# EAGLE board power_supply (EAGLE 5.10)
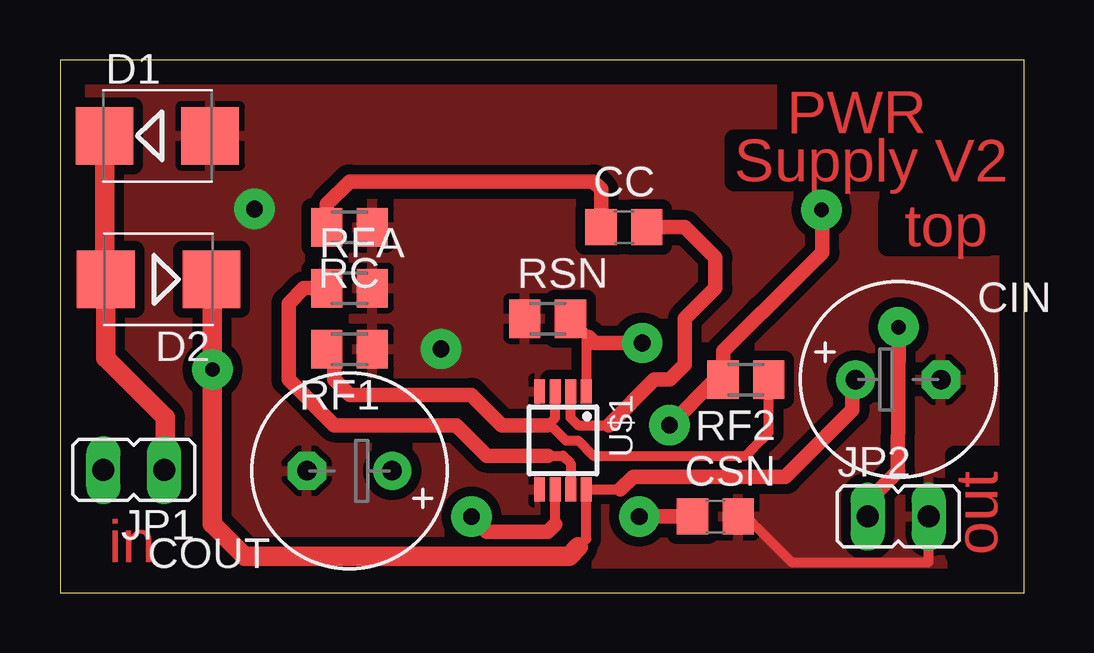
[diagram p0: board, top side]
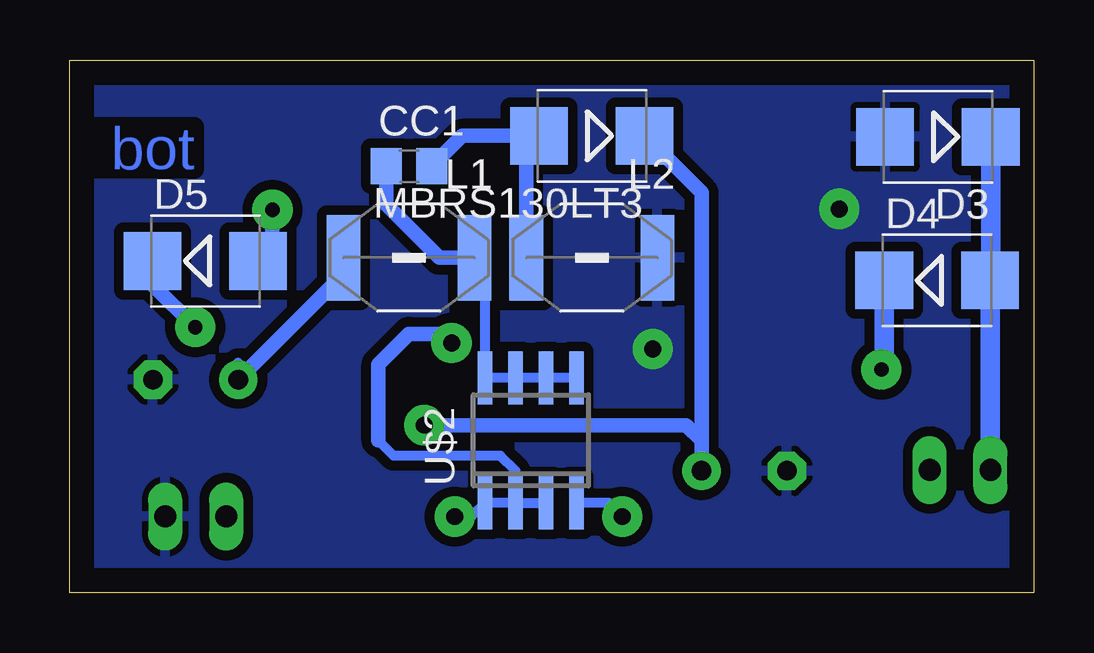
[diagram p1: board, bottom side, seen from below]

Size 40.17 x 22.21 mm. Coordinates in mm from the lower left corner, seen from the top.
Outline: 0,0 40.17,0 40.17,22.21 0,22.21 0,0
Copper layers (1*16): Top 0.035mm / dielectric 1.5mm / Bottom 0.035mm
Design rules "default": minimum track width 10mil, minimum drill 24mil, track to track 8mil, track to pad 8mil, pad to pad 8mil, via to via 8mil, smd to smd 8mil, copper to edge 40mil, drill to drill 8mil, minimum pad ring 10mil, minimum via ring 8mil, stop-mask expansion 4mil, vias tented up to drill 0mil, thermal gap 10mil

## Footprints (pad centres in the part's own frame; a part is rotated, then mirrored left to right if it is on the bottom)
C0805 = smd 1.3 x 1.5: 1 -0.95,0; 2 0.95,0
E3,5-8 = drill 0.813 pad 1.6 round: + -1.778,0 | drill 0.813 pad 1.6 octagon: - 1.778,0
SMB = smd 2.4 x 2.4: A 2.2,0; C -2.2,0
JP1 = drill 0.914 long: 1 0,-1.27; 2 0,1.27
S = smd 1.4 x 3.56: 1 -2.73,0; 2 2.73,0
M0805 = smd 1.3 x 1.6: 1 -0.95,0; 2 0.95,0
LM3478MM = smd 0.45 x 1: 1 -0.975,-2.05; 2 -0.325,-2.05; 3 0.325,-2.05; 4 0.975,-2.05; 5 0.975,2.05; 6 0.325,2.05; 7 -0.325,2.05; 8 -0.975,2.05
IRF7807PBF = smd 0.6 x 2.2: 1 -1.905,-2.6; 2 -0.635,-2.6; 3 0.635,-2.6; 4 1.905,-2.6; 5 1.905,2.6; 6 0.635,2.6; 7 -0.635,2.6; 8 -1.905,2.6

## Placement (x,y rotation side)
CC  22nF  [C0805]  23.5,15.24 0 top
CC1  1u  [C0805]  26.04,17.78 0 bottom
CIN  [E3,5-8]  34.92,8.89 0 top
COUT  [E3,5-8]  12.06,5.08 180 top
CSN  1n  [C0805]  27.3,3.17 0 top
D1  [SMB]  4.06,19.05 0 top
D2  [SMB]  4.11,13.07 180 top
D3  [SMB]  3.99,19.01 180 bottom
D4  [SMB]  4.03,13.03 0 bottom
D5  [SMB]  34.52,13.83 0 bottom
JP1  [JP1]  3.07,5.12 90 top
JP2  [JP1]  34.92,3.17 270 top
L1  [S]  26.04,13.97 180 bottom
L2  [S]  18.41,13.97 180 bottom
MBRS130LT3  [SMB]  18.41,19.05 180 bottom
RC  4,7k  [M0805]  12.06,15.24 180 top
RF1  11k  [M0805]  12.06,10.16 180 top
RF2  51k  [M0805]  28.57,8.89 180 top
RFA  40k  [M0805]  12.06,12.7 0 top
RSN  0.05  [M0805]  20.32,11.43 0 top
U$1  LM3478MM  [LM3478MM]  20.95,6.35 180 top
U$2  IRF7807PBF  [IRF7807PBF]  20.95,6.35 0 bottom

## Library data of the parts
CC CC1 CIN COUT CSN RC RF1 RF2 RFA RSN = rcl
D1-D5 MBRS130LT3 = diode
JP1 JP2 = jumper
L1 L2 = wuerth_elektronik_eisos__v6.5
U$1 = LM3478MM
U$2 = IRF7807PBF

## Nets
FB: RF1.2 RF2.1 U$1.3
GND: CIN.- COUT.- CSN.2 D1.A D3.A JP2.2 L2.1 RC.1 RF1.1 RFA.2 RSN.1 U$1.4 U$1.5
GNDIO: D3.C D4.A JP1.2
N$1: CC.2 U$1.2
N$2: COUT.+ D5.A MBRS130LT3.C RF2.2
N$3: CC.1 RC.2
N$4: RFA.1 U$1.7
N$7: U$1.6 U$2.4
N$8: CC1.2 L2.2 MBRS130LT3.A
N$9: CC1.1 L1.1 U$2.5 U$2.6 U$2.7 U$2.8
N$11: CSN.1 RSN.2 U$1.1 U$2.1 U$2.2 U$2.3
V+: CIN.+ D2.C D4.C L1.2 U$1.8
VCC: D5.C JP2.1
VCC/2: D1.C D2.A JP1.1

## Tracks (layer width: path | path; a pad name or v marks a point on that pad's centre or on a via)
FB
  Top 0.406: U$1.3 20.63,7.29 20.32,6.99 20.45,6.99 21.08,6.35 21.59,6.35 22.23,5.71 28.57,5.71 28.89,6.03 29.52,6.67 RF2.1 | 11.43,9.85 RF1.2
  Top 0.61: 11.43,9.85 11.43,8.89 12.06,8.26 17.14,8.26 18.41,6.99 20.32,6.99
GND  (via drill 0.7 pad 1.68)
  Top 0.406: CSN.2 28.57,3.17 30.48,1.27 36.2,1.27 JP2.2
  other vias: 15.88,10.16 8.1,16
  pour Top (isolate 0.406): -0.05,21.54 44.25,21.59 44.25,0 -0.05,-0.05
  pour Bottom (isolate 0.406): -0.1,22.23 44.21,22.23 44.21,-0.64 -0.1,-0.64
GNDIO
  Bottom 0.813: JP1.2 1.8,13 D4.A 1.83,13.62 1.79,13.66 D3.C
N$1
  Top 0.406: U$1.2 21.28,7.29 21.59,6.99 22.86,6.99
  Top 0.61: CC.2 26.04,15.24 27.3,13.97 27.3,12.7 26.04,11.43 26.04,9.53 25.4,8.89 24.77,8.89 22.86,6.99
N$2  (via drill 0.6 pad 1.68, 0.7 pad 1.68)
  Top 0.406: v25.4,6.99 25.72,6.99
  Top 0.61: v25.4,6.99 27.3,8.89 RF2.2 27.62,10.07 29.23,11.68 29.26,11.68 31.76,14.19 31.76,15.76 v31.73,15.96
  Bottom 0.406: COUT.+ 13.84,6.22
  Bottom 0.61: COUT.+ 13.84,6.35 | 13.84,6.35 13.84,16.68 MBRS130LT3.C | v25.4,6.99 14.48,6.99 13.84,6.35 | v31.73,15.96 31.73,14.39 D5.A
N$3
  Top 0.61: RC.2 11.12,16.2 12.06,17.14 22.23,17.14 22.55,16.82 CC.1
N$4
  Top 0.406: U$1.7 21.28,5.39 20.95,5.71 20.32,5.71
  Top 0.61: 20.32,5.71 17.78,5.71 16.51,6.99 11.43,6.99 9.53,8.89 9.53,12.06 10.16,12.7 RFA.1
N$7  (via drill 0.7 pad 1.68)
  Top 0.406: 20.63,2.85 U$1.6
  Top 0.61: v17.14,3.17 17.78,2.54 20.32,2.54 20.63,2.85
  Bottom 0.406: U$2.4 17.72,3.75 v17.14,3.17
N$8
  Bottom 0.61: CC1.2 23.82,19.05 MBRS130LT3.A 21.14,18.52 L2.2
N$9
  Bottom 0.406: L1.1 22.86,13.53 U$2.8 U$2.7 U$2.6 U$2.5
  Bottom 0.61: L1.1 24.77,13.97 26.98,16.19 CC1.1
N$11  (via drill 0.7 pad 1.68)
  Top 0.406: 21.93,10.16 U$1.1 | 21.93,10.16 21.93,10.77 RSN.2 22.03,10.67 | 21.93,10.16 22.18,10.41
  Top 0.61: v24.26,10.41 22.29,10.41 22.03,10.67 | v24.13,3.17 CSN.1
  Bottom 0.406: v24.13,3.17 23.43,3.17 U$2.1 U$2.2 | U$2.2 U$2.3 | U$2.2 21.59,5.08 22.23,5.71 26.67,5.71 27.3,6.35
  Bottom 0.61: 27.3,6.35 27.3,9.53 26.04,10.79 24.64,10.79 v24.26,10.41
V+  (via drill 0.6 pad 1.68)
  Top 0.406: 23.35,4.3 U$1.8 21.93,2.25 21.59,1.91
  Top 0.61: CIN.+ 33.02,8.76 33.02,7.62 30.23,4.83 23.88,4.83 23.35,4.3
  Top 0.813: 21.59,1.91 21.21,1.52 7.7,1.52 6.35,2.87 v6.35,9.31 6.35,12.48 D2.C
  Bottom 0.406: CIN.+ 33.15,9.59
  Bottom 0.61: L1.2 28.77,13.27 CIN.+
  Bottom 0.813: D4.C 6.23,9.43 v6.35,9.31
VCC  (via drill 0.6 pad 1.68)
  Top 0.61: JP2.1 33.66,3.81 34.92,5.08 34.91,5.09 v34.94,11.07
  Bottom 0.61: D5.C 36.68,13.24 36.68,12.82 v34.94,11.07
VCC/2
  Top 0.813: JP1.1 4.39,5.17 4.39,7.3 1.91,9.79 D2.A 1.86,12.57 D1.C
  Bottom 0.813: JP1.1 4.27,5.12 4.24,5.14

## Text on the board
Top: PWR | Supply V2 | top | out | in
Bottom: bot